# Altium PCB TivaC.PcbDoc (part 2 of 3)
Units mil, origin at the board's own origin, x right, y up, seen from the top; angles counter-clockwise.
Board outline 2000 x 2600 mil, 6 copper layers (L1, L2(GND), L3, L4, L5(PWR), L6), stack 61.068 mil thick; 95 components, 90 nets, 380 pads, 190 vias.
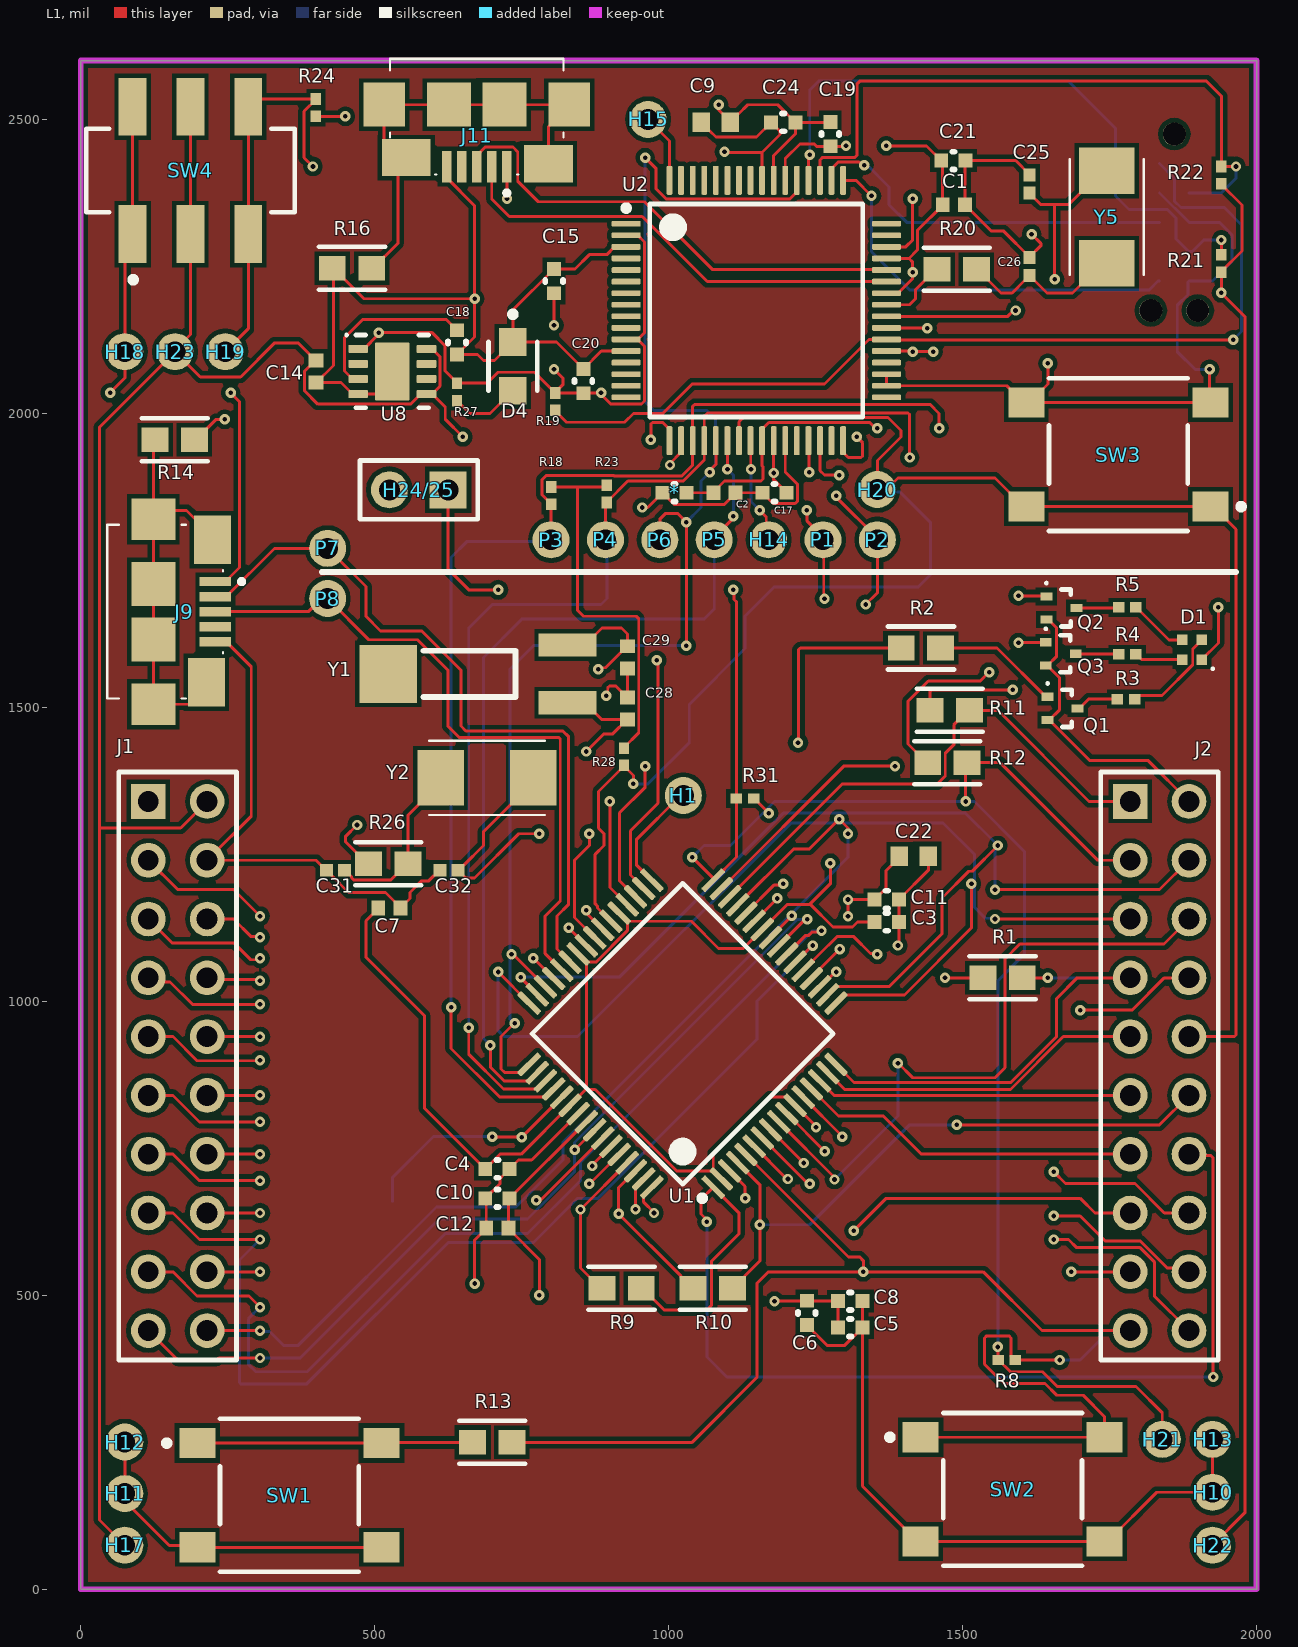
[diagram p0: L1 view]

## Part data (continued)
U1 U2: library part TM4C123GH6PMI, "Tiva C Series Microcontroller, 256 KB Flash, 32 KB SRAM, 12 Bit, 12 Channels, -40 to 85 degC, 64-Pin LQFP (PM), Green (RoHS & no Sb/Br), Tape and Reel", Case/Package=LQFP, Frequency=80MHz, Manufacturer="Texas Instruments", Max Operating Temperature=85°C, Max Supply Voltage=3.63V, Min Operating Temperature=-40°C, Min Supply Voltage=3.15V, Operating Supply Voltage=3.3V, Package Quantity=1000, Supplier Part Number 1=296-46360-1-ND, Temperature Range="-40 to 85 degC", ADC Channels=12, ADC Resolution="12 Bit", ComponentLink1Description="Manufacturer URL", ComponentLink1URL=http://www.ti.com/, ComponentLink2Description=Datasheet, ComponentLink2URL=http://www.ti.com/lit/ds/symlink/tm4c123gh6pm.pdf, ComponentLink3Description="Package Specification", ComponentLink3URL=http://www.ti.com/litv/pdf/mtqf008a, ComponentLink4Description=https://datasheet.ciiva.com/18628/tm4c123gh6pm-18628995.pdf?src-supplier=Digi-Key, ComponentLink4URL=https://datasheet.ciiva.com/18628/tm4c123gh6pm-18628995.pdf?src-supplier=Digi-Key, ComponentLink5Description=https://datasheet.ciiva.com/29986/tm4c123gh6pm-29986949.pdf?src-supplier=Avnet, ComponentLink5URL=https://datasheet.ciiva.com/29986/tm4c123gh6pm-29986949.pdf?src-supplier=Avnet, Core Architecture=ARM, Data Bus Width=32b, Data Memory="32 KB", DatasheetVersion="Rev. 15741.2722", GPIOs=43, I2C=2, Interface=I2C,USB,CAN,UART,SPI,IrDA,USART,I2S, Lead Free="Lead Free", Manufacturer Part Number=TM4C123GH6PMIR, Max Frequency=80MHz, Max Speed="80 MHz", Memory Size=256KB, Memory Type=FLASH, Mounting Technology="Surface Mount", Number of A/D Converters=12, Number of ADC Channels=12, Number of Bits=12, Number of GPIO=43, Number of I/Os=43, Number of Pins=64, Number of Programmable I/O=49, Number of Timers/Counters=12, Number of UART Channels=4, Oscillator Type=Internal, PackageDescription="64-Pin Plastic Quad Flatpack, Body 10 x 10 mm, Pitch 0.5 mm", PackageReference=PM0064A, PackageVersion=4040152/C, Packaging="Tape and Reel", Packing="Tape and Reel", PartNumber=TM4C123GH6PMIR, Peripherals="Brown-out Detect/Reset,POR,PWM,WDT,DMA", Prefix="Qualified Device", Pricing 1="1 = 11.85000, 10 = 10.70700, 25 = 10.20880, 100 = 8.86440, 250 = 8.46600, 500 = 7.71900 (USD)", Program Memory="256 KB", Radiation Hardening=No, RAM Size=32KB, RoHS=TRUE, RoHS Compliant=Yes, Stock 1=2640, Supplier 1=Digi-Key, Tiva Series="Connected MCUs", UART=4, Watchdog Timer=Yes
U8: "Single Output Low Noise LDO, 400 mA, Fixed 3.3 V Output, 1.7 to 5.5 V Input, with Reverse Current Protection, 8-pin SON (DRB), -40 to 85 degC, Green (RoHS & no Sb/Br)", Case/Package=VSON, Dropout Voltage=75mV, Input Bias Current=300uA, Manufacturer="Texas Instruments", Max Input Voltage=5.5V, Max Operating Temperature=125°C, Max Output Current=400mA, Max Output Voltage=3.3V, Max Power Dissipation=2.5W, Min Input Voltage=1.7V, Min Operating Temperature=-40°C, Output Voltage Accuracy=0.5%, Package Quantity=250, Rating=Catalog, Supplier Part Number 1=296-32558-1-ND, Accuracy=1%, Accuracy(%)=1, ComponentLink1Description="Manufacturer URL", ComponentLink1URL=http://www.ti.com/, ComponentLink2Description=Datasheet, ComponentLink2URL=http://www.ti.com/general/docs/lit/getliterature.tsp?genericPartNumber=TPS73633&fileType=pdf, ComponentLink3Description="Package Specification", ComponentLink3URL=http://www.ti.com/litv/pdf/mpds118h, ComponentLink4Description="URL Link1", ComponentLink4URL="Samples URL:http://www.ti.com/product/tps73633#samples", ComponentLink5Description=https://datasheet.ciiva.com/15111/getdatasheetpartid-48105-15111075.pdf?src-supplier=Verical, ComponentLink5URL=https://datasheet.ciiva.com/15111/getdatasheetpartid-48105-15111075.pdf?src-supplier=Verical, DatasheetVersion=SBVS038T, Eco-Plan="Green (RoHS & no Sb/Br)", Fixed Output Options(V)=3.3, Iout(Max)(A)=0.4, Iq(Typ)(mA)=0.3, Lead Free="Lead Free", Manufacturer Part Number=TPS73633DRBT, Min Current Limit=400mA, Min Output Voltage=3.3V, Mounting Technology="Surface Mount", Number of Outputs=1, Number of Pins=8, Number of Regulators=1, Output Current=400mA, Output Type=Fixed, Output Voltage=3.3V, PackageDescription="8-Pin Plastic Small Outline, Body 3 x 3 mm, Pitch 0.65 mm", PackageReference=DRB0008A, PackageVersion=4203482-2/K, Packaging="Tape and Reel", PartNumber=TPS73633DRBT, Polarity=Positive, Power Dissipation=2.5W, Pricing 1="1 = 2.53000, 10 = 2.27500, 25 = 2.14640, 100 = 1.82880 (USD)", Quiescent Current=300uA, Radiation Hardening=No, RoHS=Yes, RoHS Compliant=Yes, Series=-, Stock 1=304, SubFamily="Single Channel LDO", Supplier 1=Digi-Key, Vdo(Typ)(mV)=75, Vin(Max)(V)=5.5, Vin(Min)(V)=1.7, Vout Adj(Max)(V)=3.3, Vout Adj(Min)(V)=3.3
Y1: "CRYSTAL 32.7680KHZ 12.5PF SMD", Case/Package=Radial, ESR (Equivalent Series Resistance)=50kR, Frequency=32.768kHz, Frequency Stability=-0.034ppm, Frequency Tolerance=20ppm, Load Capacitance=12.5pF, Manufacturer=Abracon, Manufacturer_Name=ABRACON, Max Operating Temperature=85°C, Min Operating Temperature=-40°C, Mouser Part Number=815-AB26TRB-32.76KHZ, Operating Frequency="32.768 kHz", Package Quantity=500, ComponentLink1Description=https://datasheet.ciiva.com/4945/ab26tr-30941-4945140.pdf?src-supplier=Mouser, ComponentLink1URL=https://datasheet.ciiva.com/4945/ab26tr-30941-4945140.pdf?src-supplier=Mouser, ComponentLink2Description=https://datasheet.ciiva.com/1357/ab26tr-1357201.pdf?src-supplier=Element14, ComponentLink2URL=https://datasheet.ciiva.com/1357/ab26tr-1357201.pdf?src-supplier=Element14, ComponentLink3Description=https://datasheet.ciiva.com/854/ab26trb-854381.pdf?src-supplier=Digi-Key, ComponentLink3URL=https://datasheet.ciiva.com/854/ab26trb-854381.pdf?src-supplier=Digi-Key, ComponentLink4Description=https://datasheet.ciiva.com/854/ab26trb-854382.pdf?src-supplier=Digi-Key, ComponentLink4URL=https://datasheet.ciiva.com/854/ab26trb-854382.pdf?src-supplier=Digi-Key, ComponentLink5Description=https://datasheet.ciiva.com/854/ab26trb-854383.pdf?src-supplier=Digi-Key, ComponentLink5URL=https://datasheet.ciiva.com/854/ab26trb-854383.pdf?src-supplier=Digi-Key, ComponentLink6Description=https://datasheet.ciiva.com/3174/ab26trb-3174233.pdf?src-supplier=Avnet, ComponentLink6URL=https://datasheet.ciiva.com/3174/ab26trb-3174233.pdf?src-supplier=Avnet, ComponentLink7Description=https://datasheet.ciiva.com/16215/ab26trb-16215317.pdf?src-supplier=Future+Electronics, ComponentLink7URL=https://datasheet.ciiva.com/16215/ab26trb-16215317.pdf?src-supplier=Future+Electronics, ComponentLink8Description=https://datasheet.ciiva.com/28508/270658-28508373.pdf?src-supplier=Element14, ComponentLink8URL=https://datasheet.ciiva.com/28508/270658-28508373.pdf?src-supplier=Element14, Datasheet Link=http://www.abracon.com/Resonators/AB26TRB.pdf, Depth=1.9mm, Height=0.075inch, Lead Free="Lead Free", Lead Pitch=2.54mm, Length=6mm, Manufacturer Part Number=AB26TRB-32.768KHZ-T, Manufacturer_Part_Number=AB26TRB-32.768KHZ-T, Mount="Surface Mount", Mouser Price/Stock=https://www.mouser.com/Search/Refine.aspx?Keyword=815-AB26TRB-32.76KHZ, Number of Pins=2, Packaging="Tape and Reel", Pricing 2="1 = 0.52000, 10 = 0.43200, 50 = 0.38880, 100 = 0.34560, 500 = 0.32832, 1000 = 0.27648 (USD)", REACH SVHC="No SVHC", RoHS=Yes, Series=AB26TRB, Series Resistance=50kR, Stock 2=97662, Supplier 1=Avnet, Supplier 2=Digi-Key, Supplier Part Number 1=AB26TRB-32.768KHZ-T, Supplier Part Number 2=535-9033-1-ND, Termination=Radial, Tolerance=20ppm
Y2 Y5: "CRYSTAL 16.0000MHZ 8PF SMD", Case/Package=SMD/SMT, ESR (Equivalent Series Resistance)=120R, Frequency=16MHz, Frequency Stability=50ppm, Load Capacitance=8pF, Manufacturer=NDK, Manufacturer Part Number=NX5032GA-16.000000MHZ-LN-CD-1, Max Operating Temperature=70°C, Min Operating Temperature=-10°C, Package Quantity=1000, Supplier Part Number 1=644-1037-1-ND, ComponentLink1Description=https://datasheet.ciiva.com/862/nx5032ga-862731.pdf?src-supplier=Digi-Key, ComponentLink1URL=https://datasheet.ciiva.com/862/nx5032ga-862731.pdf?src-supplier=Digi-Key, ComponentLink2Description=https://datasheet.ciiva.com/862/nx5032ga-862732.pdf?src-supplier=Digi-Key, ComponentLink2URL=https://datasheet.ciiva.com/862/nx5032ga-862732.pdf?src-supplier=Digi-Key, ComponentLink3Description=https://datasheet.ciiva.com/862/nx5032ga-862733.pdf?src-supplier=Digi-Key, ComponentLink3URL=https://datasheet.ciiva.com/862/nx5032ga-862733.pdf?src-supplier=Digi-Key, Datasheet Link=https://media.digikey.com/pdf/Data%20Sheets/NDK%20PDFs/NX5032GA.pdf, Frequency Tolerance=50ppm, Height=1.5mm, Length=0.197inch, Manufacturer_Name=NDK, Manufacturer_Part_Number=NX5032GA-16.000000MHZ-LN-CD-1, Mount="Surface Mount", Number of Pins=2, Packaging="Tape and Reel", Pricing 1="1 = 0.60000, 10 = 0.50000, 50 = 0.45000, 100 = 0.40000, 500 = 0.38000 (USD)", RoHS=Yes, Series=NX5032GA, Stock 1=25488, Supplier 1=Digi-Key, Width=0.126inch

## Via types
v1: diameter 17.72, hole 7.87, L1 to L3, 65 vias
v2: diameter 17.72, hole 7.87, L1 to L4, 60 vias
v3: diameter 17.72, hole 7.87, L4 to L6, 29 vias
v4: diameter 17.72, hole 7.87, L1 to L2(GND), 15 vias
v5: diameter 17.72, hole 7.87, L1 to L6, 14 vias
v6: diameter 17.72, hole 7.87, L1 to L5(PWR), 6 vias
v7: diameter 17.72, hole 7.87, L3 to L6, 1 vias

## Nets (pads, with @x,y where several pads share a name; then routed paths per layer and width w, separated by ;. In a path a pad name is that pad's centre, name@x,y a point inside that pad or via, vN(x,y) a via of type N, cw(c..) or ccw(c..) an arc to the next point about the centre after c; other vN are vias at no path point)
+3.3V: C1.1 C15.1 C17.1 C19.1 C20.1 C21.1 H22.1 H24/25.2 J1.1 R19.1 R21.1 R22.1 R27.2 U2.2 U2.11 U2.26 U2.37 U2.42 U2.45 U2.54 U8.1 | length 4886.4
  L1 w5: U8.1@471.93,2109.72 481.77,2109.72 493.23,2121.19 493.23,2121.29 507.05,2135.11 v4(507.05,2137.28) 597.72,2137.28 619.3,2115.7 619.3,2072.93 626.48,2065.75 626.57,2065.75 640,2052.32 R27.2@640,2051.34 691.24,2051.34 709.9,2070 771.78,2070 799.68,2042.11 800.66,2042.11 805,2037.77 805,2036.78 R19.1@807.02,2034.76 ; v1(805,2075) 820,2060 820,2048.73 807.02,2035.75 R19.1@807.02,2034.76 ; v1(805,2150) C15.1@805,2204.33 ; U2.11@927.66,2125.79 U2.11@947.35,2125.79 ; U2.2@927.66,2302.95 947.35,2302.95 958.77,2291.53 958.77,2137.21 U2.11@947.35,2125.79 ; U2.26@1178.65,1953.54 1178.65,1887.02 C17.1@1200.67,1865 ; U2.54@1198.33,2396.46 1198.33,2433.33 1223.36,2458.36 1247.6,2458.36 1251.63,2454.33 C19.1@1275,2454.33 1300.97,2454.33 v2(1301.64,2455) ; v2(1370,2455) 1438.66,2455 C21.1@1463.66,2430 1466.1,2427.56 C1.1@1466.1,2355 1466.1,2354.21 1423,2311.11 1423,2278 1408.58,2263.58 ; U2.37@1370.58,2106.1 1413.9,2106.1 v6(1415,2105) v2(1450,2105) ; U2.42@1370.58,2204.53 1390.26,2204.53 1415,2229.27 v6(1415,2240) 1415,2257.17 1408.58,2263.58 ; U2.45@1370.58,2263.58 1408.58,2263.58 ; H22.1@1925,75 1980,130 1980,2165 v2(1940,2205) R21.1@1940,2240.24 1940,2241.22 1975,2276.22 1975,2354.49 1940,2389.49 R22.1@1940,2390.47 ; R19.1@807.02,2034.76 854.57,2034.76 C20.1@855,2034.33 884.33,2034.33 v6(885,2035) 885,2032.46 901.52,2015.94 953.81,2015.94 958.77,2020.9 958.77,2114.37 U2.11@947.35,2125.79
  L3 w12: v1(805,2075) v1(805,2150)
  L4 w12: v2(1301.64,2455) v2(1370,2455) ; v2(1450,2105) 1895,2105 1940,2150 v2(1940,2205)
  L2(GND) w5: v4(507.05,2137.28) v4@509.33,2135
  other v6: 1178.65,1898.65
+ICDI_VBUS: H19.1 J11.1 R24.1 SW4.3 SW4.6 | length 1090.1
  L1 w5: H19.1@245.89,2105 285,2144.11 SW4.3@285,2305 SW4.6@285,2521.54 298.23,2534.76 R24.1@400,2534.76 400,2533.78 380,2513.78 380,2435 v1(395,2420) ; J11.1@724.74,2419.68 725,2419.42 v1(725,2365)
  L3 w12: v1(395,2420) 450,2365 v1(725,2365)
+MCU_PWR: R18.1 R23.1 R28.2 | length 646.9
  L1 w5: R18.1@800,1874.76 845.88,1874.76 ; R23.1@895,1878 891.76,1874.76 845.88,1874.76 ; R28.2@924,1430.76 924,1431.75 949.1,1456.85 949.1,1650.9 945,1655 855,1655 845,1665 845,1873.88 845.88,1874.76
+MCU_VDDC: C10.1 C11.1 C12.1 C22.1 U1.25 U1.56 | length 697.5
  L1 w5: v6(780,500) 780,561.01 727.56,613.45 C12.1@727.56,614.24 727.56,663.14 C10.1@729.33,664.92 859.66,795.25 U1.56@860.07,795.25 ; U1.25@1173.26,1108.44 1173.26,1108.76 1209.53,1145.03 v1(1209.53,1145.35) ; v6(1305,1145) v1(1305,1173.14) 1350.19,1173.14 C11.1@1350.33,1173 1370,1192.67 1370,1222.64 1392.39,1245.03 C22.1@1392.39,1247
  L3 w12: v1(1209.53,1145.35) 1210.35,1145.35 1240,1175 1270.8,1175 1272.66,1173.14 v1(1305,1173.14)
+USB_VBUS: H18.1 J9.1 SW4.1 SW4.4 | length 1062.6
  L1 w5: v1(50,2035) 75,2060 H18.1@75,2105 75,2291.85 SW4.1@88.15,2305 SW4.4@88.15,2521.54 ; J9.1@228.86,1713.94 247.56,1713.94 252.93,1719.31 252.93,1720.86 270,1737.93 270,2020 v1(255,2035)
  L3 w12: v1(50,2035) v1(255,2035)
+VBUS: C14.1 D1.1 H17.1 H23.1 J1.2 SW4.2 SW4.5 U8.5 U8.8 | length 5093.2
  L1 w5: H17.1@75,75 32,118 32,1295 ; SW4.5@186.57,2521.54 SW4.2@186.57,2305 186.57,2134.02 160.44,2107.89 H23.1@160.44,2105 ; J1.2@215,1340 170,1295 32,1295 ; U8.8@588.07,2109.72 597.91,2109.72 611.3,2096.33 611.3,2046.34 U8.5@597.91,2032.95 ; 609.37,2021.49 U8.5@597.91,2032.95 ; 609.38,2021.49 620,2010.87 620,1990 v2(650,1960) ; D1.1@1906.73,1581.27 1935,1609.54 v2(1935,1670) ; 32,1295 32,1976.56 H23.1@160.44,2105 ; H23.1@160.44,2105 203.44,2062 272,2062 330,2120 369.45,2120 399.21,2090.24 380.9,2071.93 380.9,2037.94 403.21,2015.63 561.01,2015.63 573.84,2028.46 573.84,2028.56 578.23,2032.95 U8.5@588.07,2032.95 U8.5@597.91,2032.95
  L4 w12: v2(650,1960) 705,1905 705,1770 755,1720 1885,1720 v2(1935,1670)
DEBUG_PC0/TCK/SWCLK: P3.1 R18.2 U1.52 U2.19 U2.30 | length 2481
  L1 w5: v3(630,990) 630,920 712.99,837.01 790.47,837.01 U1.52@804.39,850.93 ; P3.1@800,1785 R18.2@800,1845.24 800,1846.22 784.64,1861.58 784.64,1887.3 791.69,1894.34 906.86,1894.34 907.36,1893.85 1022.53,1893.85 1040.85,1912.17 U2.19@1040.85,1953.54 1040.85,2012.07 1043.78,2015 1445,2015 1460,2000 v1(1460,1975) ; U2.30@1257.39,1973.23 U2.30@1257.39,1953.54 1257.39,1902.61 1265,1895 v1(1290,1895)
  L3 w12: v1(1290,1895) 1341.86,1946.86 1453.14,1946.86 1458.91,1952.62 1458.91,1973.91 v1(1460,1975)
  L6 w5: v3(630,990) 630,1755 657.43,1782.43 797.43,1782.43 P3.1@800,1785
  other v2: 630,990
DEBUG_PC1/TMS/SWDIO: P4.1 R23.2 U1.51 U2.20 U2.29 | length 2260.6
  L1 w5: v3(660,955) 660,910 719.07,850.93 776.55,850.93 U1.51@790.47,864.85 ; P4.1@893.75,1783.75 P4.1@892.5,1785 892.5,1845.97 R23.2@895,1848.47 895,1849.46 930.54,1885 1025,1885 1060.54,1920.54 U2.20@1060.54,1953.54 1060.54,1995.54 1065.85,2000.85 1407.07,2000.85 1410,1997.92 v2(1410,1925) ; U2.29@1237.7,1973.23 U2.29@1237.7,1953.54 1238.47,1952.78 1238.47,1900.65 v2(1239.23,1899.88)
  L4 w12: v2(1239.23,1899.88) 1239.88,1899.88 1256.94,1916.94 1401.94,1916.94 v2(1410,1925)
  L6 w5: v3(660,955) 660,1635 700,1675 885,1675 895,1685 895,1782.5 P4.1@892.5,1785
  other v2: 660,955
DEBUG_PC2/TDI: P5.1 U1.50 U2.22 | length 1529.3
  L1 w5: v3(696.64,925) 696.64,888.36 720.15,864.85 762.63,864.85 U1.50@776.55,878.76 ; P5.1@1077.5,1785 1077.5,1792.5 1080.94,1792.5 1110,1821.56 v3(1110,1825) ; U2.22@1099.91,1953.54 1099.95,1953.5 v2(1100,1905) v2(1100,1905)
  L6 w5: v3(696.64,925) 685,936.64 685,1585 750,1650 1060,1650 1077.5,1667.5 P5.1@1077.5,1785 ; v2(1100,1905) 1110,1895 v3(1110,1825)
  other v2: 696.64,925 1110,1825
  other v3: 1100,1905
DEBUG_PC3/TDO/SWO: P6.1 U1.49 U2.21 U2.53 | length 2517.9
  L1 w5: v5(737.98,962.98) 715,940 715,885 721.24,878.76 748.71,878.76 U1.49@762.63,892.68 ; v3(960,2435) 978.73,2416.27 978.73,2381.64 995.37,2365 1206.25,2365 1218.02,2376.77 U2.53@1218.02,2396.46 ; P6.1@1000,1788.44 1000,1785 P6.1@985,1785 985,1820 995,1830 1015,1830 v2(1030,1815) v3(1030,1605) ; v3(1070,1900) 1070,1902.69 1080.22,1912.91 U2.21@1080.22,1953.54
  L6 w5: v5(737.98,962.98) 736.37,962.98 730,969.35 730,1565 770,1605 v3(1030,1605) ; v3(960,2435) 960,2020 975,2005 1065,2005 1080,1990 1080,1913.13 1070,1903.13 v3(1070,1900) 1055,1885 1055,1840 v2(1030,1815)
  other v2: 1030,1605 1070,1900 960,2435
  other v3: 1030,1815
EXTDBG: H14.1 U2.24 | length 181.3
  L1 w5: U2.24@1139.28,1953.54 1139.64,1953.18 1139.64,1905.36 v3(1140,1905) ; v2(1155,1835) 1166,1824 1166,1789 H14.1@1170,1785
  L6 w5: v3(1140,1905) 1140,1850 v2(1155,1835)
  other v2: 1140,1905
  other v3: 1155,1835